# EAGLE board board-B (EAGLE 9.6.2)
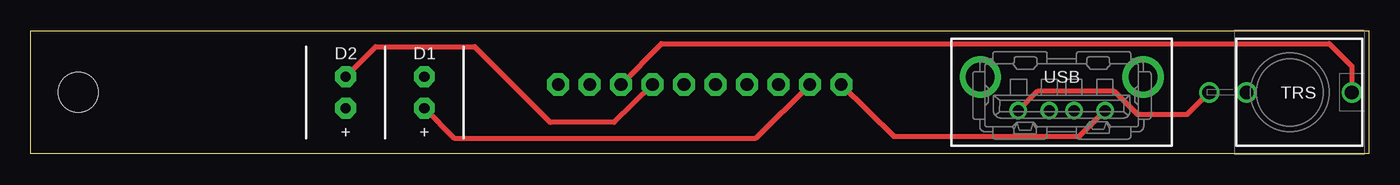
[diagram p0: board, top side]
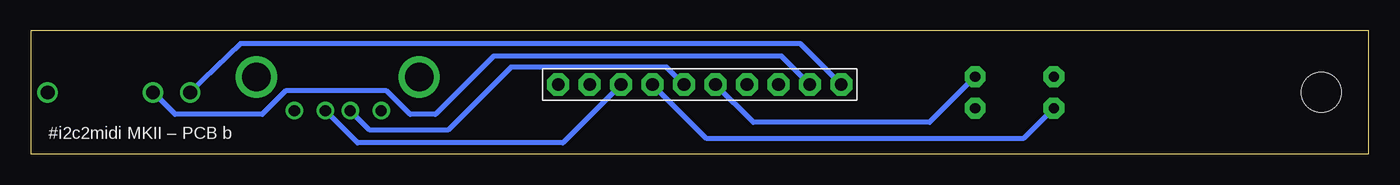
[diagram p1: board, bottom side, seen from below]

Size 107.95 x 9.91 mm. Coordinates in mm from the lower left corner, seen from the top.
Outline: 0,0 0,9.91 107.95,9.91 107.95,0 0,0
Copper layers (1*16): Top 0.035mm / dielectric 1.5mm / Bottom 0.035mm
Design rules "default *": minimum track width 6mil, minimum drill 0.35mm, track to track 6mil, track to pad 6mil, pad to pad 6mil, via to via 6mil, smd to smd 6mil, copper to edge 10mil, drill to drill 6mil, minimum pad ring 10mil, minimum via ring 8mil, stop-mask expansion 4mil, vias tented up to drill 0mil, thermal gap 10mil
Holes 3.2 mm at 3.81,4.95

## Footprints (pad centres in the part's own frame; a part is rotated, then mirrored left to right if it is on the bottom)
LED3MM = drill 0.813 pad 1.676 octagon: A -1.27,0; K 1.27,0
WQP-PJ366ST_JACK = drill 1.1: P$1_TIP 0,5; P$2_SWITCH 0,-3.5; P$3_SLEEVE 0,-6.5
1X10-BIG = drill 1.016 pad 1.778 octagon: 1 -11.43,0; 2 -8.89,0; 3 -6.35,0; 4 -3.81,0; 5 -1.27,0; 6 1.27,0; 7 3.81,0; 8 6.35,0; 9 8.89,0; 10 11.43,0
KUSBVX = drill 0.9 pad 1.3: 1 3.5,0; 2 1,0; 3 -1,0; 4 -3.5,0 | drill 2.3 pad 2.8: M1 -6.57,2.71; M2 6.57,2.71

## Placement (x,y rotation side)
D1  [LED3MM]  31.75,4.95 90 top
D2  [LED3MM]  25.4,4.95 90 top
U1  THONKI-STEREO  [WQP-PJ366ST_JACK]  101.6,4.95 270 top
U$2  PINHD-1X10  [1X10-BIG]  53.98,5.59 0 bottom
X1  KUSBVX  [KUSBVX]  83.19,3.48 0 top

## Library data of the parts
D1 D2 U$2 = adafruit_jh1
U1 = MusicThingModular_jh
X1 = con-kycon_jh

## Nets
D-: U$2.3 X1.2
GND: U1.P$3_SLEEVE U$2.10 X1.4
LED1: D1.K U$2.6
LED2: D2.K U$2.7
PIN2: D1.A U$2.2
PIN3: D2.A U$2.4
S$21: U$2.1 X1.1
S$22: U$2.5 X1.3
S-MIDI-L: U1.P$1_TIP U$2.8
S-MIDI-R: U1.P$2_SWITCH U$2.9

## Tracks (layer width: path | path; a pad name or v marks a point on that pad's centre or on a via)
D-
  Bottom 0.406: X1.2 81.59,0.89 65.02,0.89 U$2.3
GND
  Top 0.406: X1.4 81.28,5.08 87.38,5.08 89.28,3.17 93.32,3.17 U1.P$3_SLEEVE
  Bottom 0.406: U1.P$3_SLEEVE 95.1,4.97 91.04,8.89 45.85,8.89 U$2.10
LED1
  Bottom 0.406: U$2.6 49.66,2.54 35.43,2.54 D1.K
LED2
  Top 0.406: U$2.7 47.07,2.54 41.91,2.54 35.81,8.64 27.81,8.64 D2.K
PIN2
  Top 0.406: U$2.2 58.5,1.27 34.16,1.27 D1.A
PIN3
  Bottom 0.406: U$2.4 53.47,1.27 27.81,1.27 D2.A
S$21
  Top 0.406: X1.1 84.6,1.4 69.64,1.4 U$2.1
S$22
  Bottom 0.406: X1.3 80.61,1.91 74.3,1.91 69.22,6.99 56.64,6.99 U$2.5
S-MIDI-L
  Top 0.406: U1.P$1_TIP 106.6,7.07 104.78,8.89 50.88,8.89 U$2.8
S-MIDI-R
  Bottom 0.406: U1.P$2_SWITCH 96.32,3.17 89.28,3.17 87.38,5.08 79.25,5.08 77.34,3.17 75.31,3.17 70.61,7.87 47.37,7.87 U$2.9

## Text on the board
tPlace: USB | TRS | + | +
bPlace: #i2c2midi MKII – PCB b